# Altium PCB BLDC_Driver_1_1.PcbDoc
Units mil, origin at the board's own origin, x right, y up, seen from the top; angles counter-clockwise.
Board outline 3369 x 3691 mil, 2 copper layers (Top Layer, Bottom Layer); 63 components, 51 nets, 175 pads, 0 vias.
Unrouted connection lines stored in the file: 124.
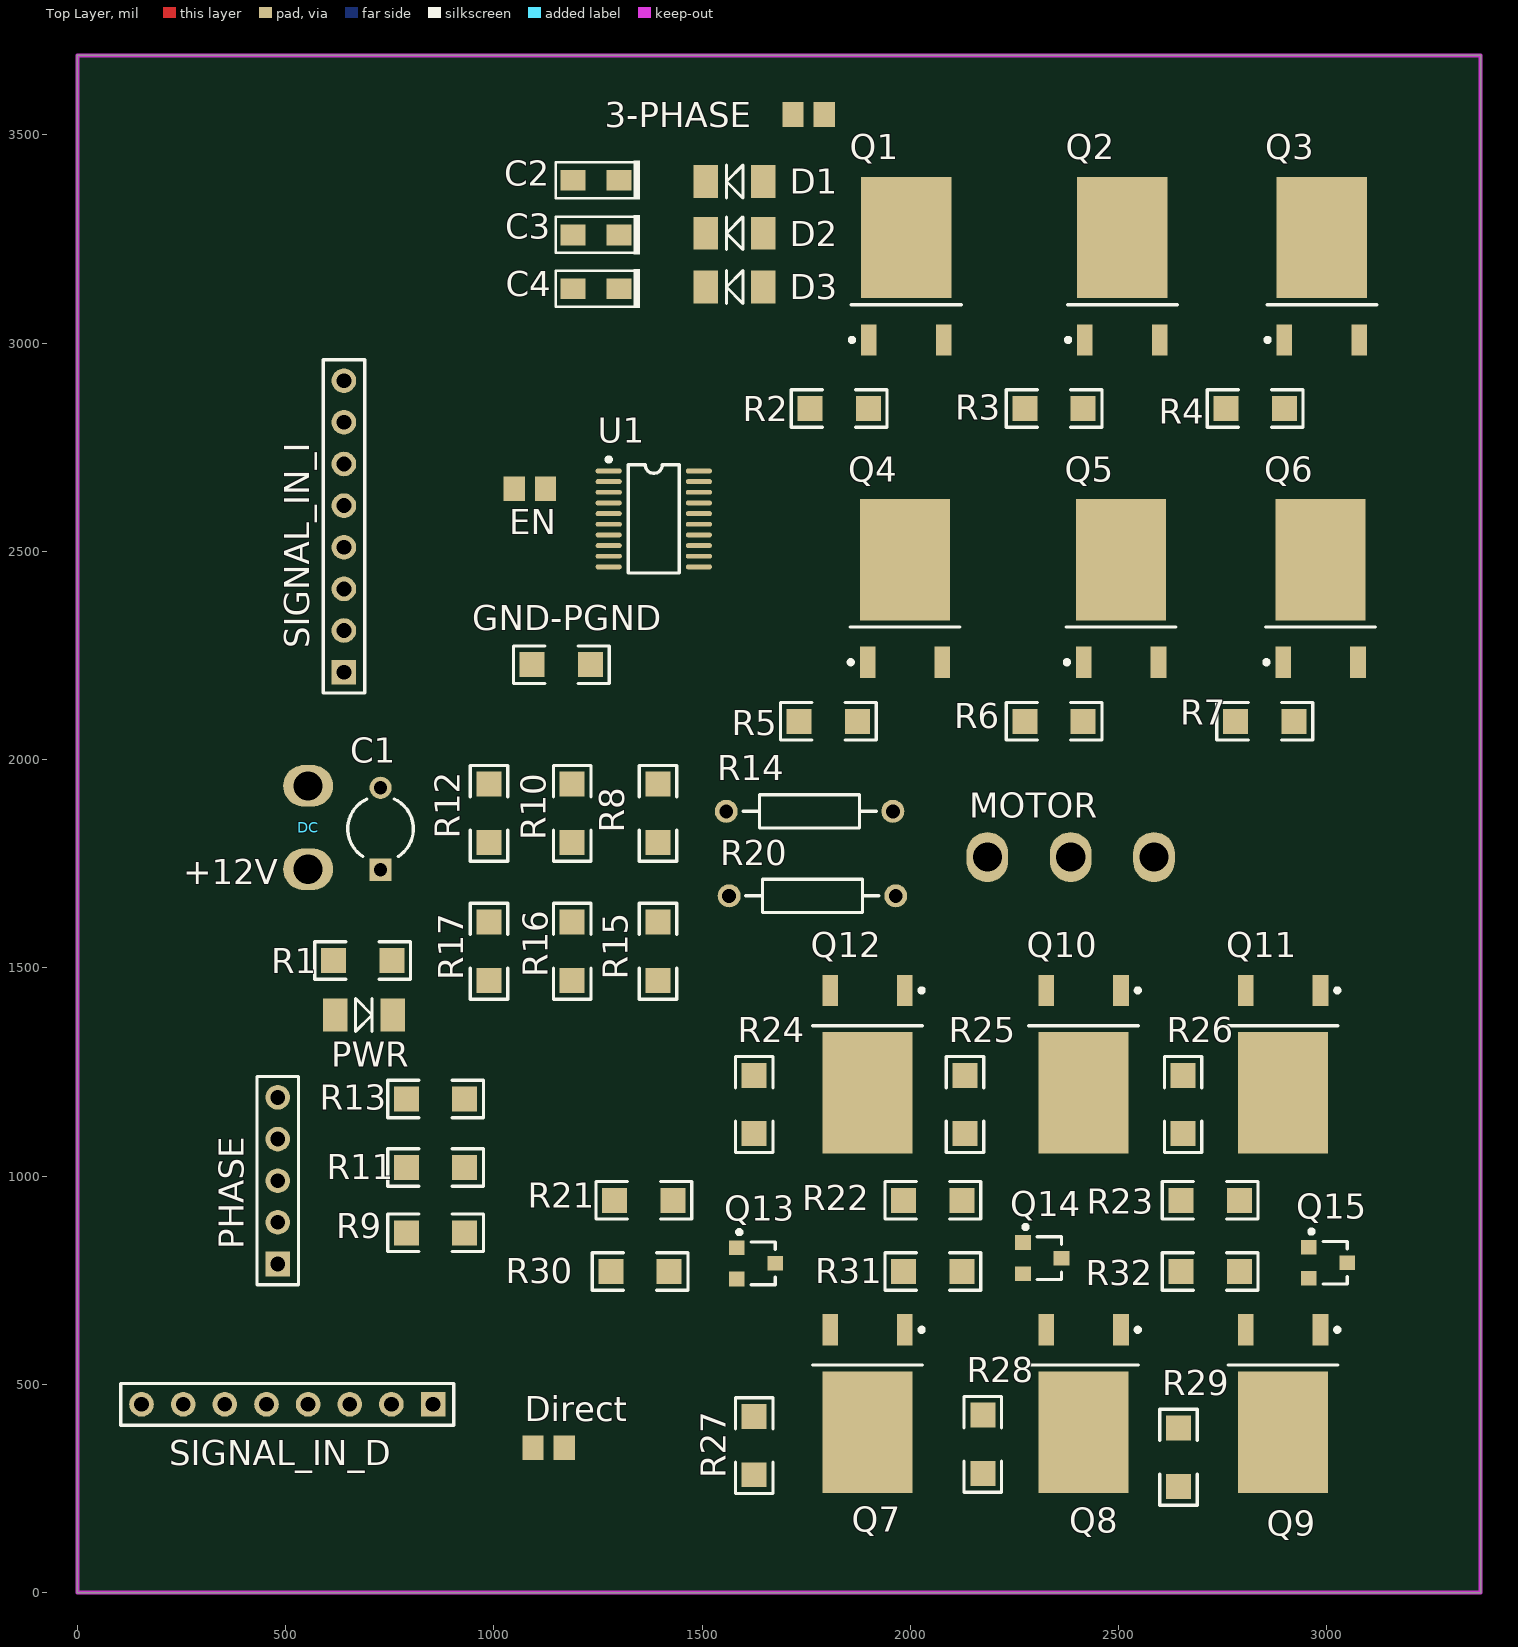
[diagram p0: Top Layer view]
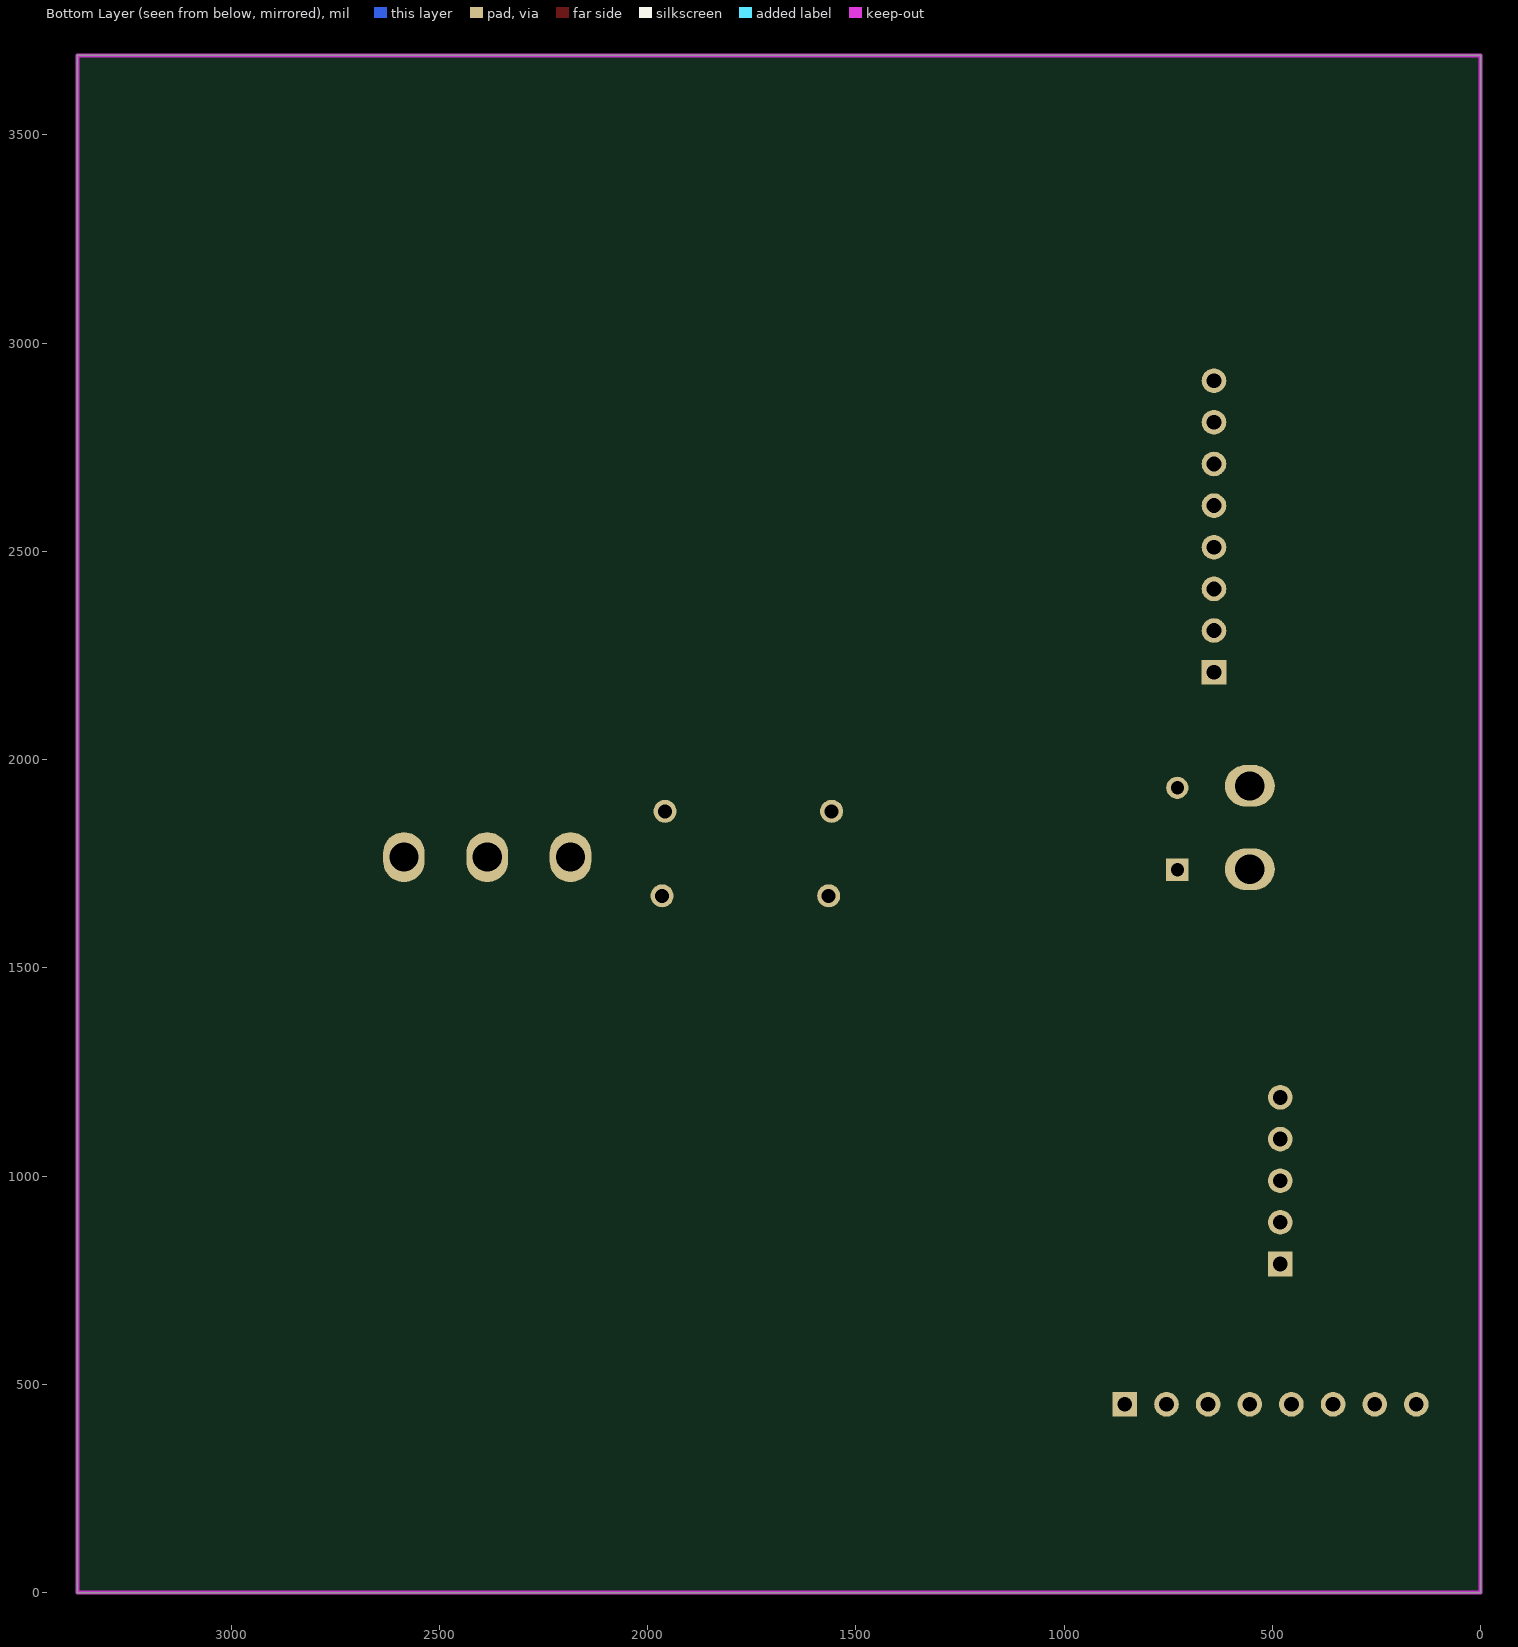
[diagram p1: Bottom Layer view, seen from below]

## Layer stack, top to bottom
Top Solder: solder mask 0.4, Solder Resist, Dk 3.5
Top Layer: signal copper 1.4
Dielectric 1: dielectric 12.6, FR-4, Dk 4.8
Bottom Layer: signal copper 1.4
Bottom Solder: solder mask 0.4, Solder Resist, Dk 3.5

## Board outline
0,0 0,3691 3369,3691 3369,0

## Design rules (kind name [scope] priority, off if disabled: settings)
Clearance [All] p1: gap=7
PolygonConnect [All] p1: connectstyle=Relief reliefconductorwidth=10 reliefentries=4 polygonreliefangle="90 Angle" airgapwidth=10
RoutingVias [All] p1: holewidth=21 width=40 viastyle="Through Hole" minholewidth=21 minwidth=40 maxholewidth=28 maxwidth=50
SolderMaskExpansion [All] p1: expansion=4
Width [All] p1: maxlimit=100 minlimit=15 preferedwidth=20
30 further rules are at their usual default settings.

## Components (designator, comment, footprint, x,y, rotation, side; value= is the part's Value field where it differs from the comment)
3-PHASE "Res2" 0805-2 1755.6,3549 r180 top
C1 "Cap2" CAPR5-4X5 728,1834 r90 top
C2 "Cap Pol" CAP-3216 1245,3391 r180 top
C3 "Cap Pol" CAP-3216 1245,3259.76 r180 top
C4 "Cap Pol" CAP-3216 1245,3130.52 r180 top
D1 "D-Schottky" DIODE-1206 1647,3387.98 r180 top
D2 "D-Schottky" DIODE-1206 1647,3264 r180 top
D3 "D-Schottky" DIODE-1206 1647,3134.76 r180 top
DC "JXZ2" JXZ2 554,1837 r270 top
Direct "Res2" 0805-2 1131.4,348 r180 top
EN "Res2" 0805-2 1086.6,2650 r180 top
GND-PGND "Res2" 1206 1162,2228 r0 top
MOTOR "JXZ3" JXZ_3 2385,1766 r0 top
PHASE "Header 5" HDR1X5 481,789 r90 top
PWR "LED2" DIODE-1206 619,1387 r0 top
Q1 "IRFR1205" TO-252AA_N 1990,3185 r90 top
Q2 "IRFR1205" TO-252AA_N 2509,3185 r90 top
Q3 "IRFR1205" TO-252AA_N 2988,3185 r90 top
Q4 "IRFR1205" TO-252AA_N 1987,2411.1 r90 top
Q5 "IRFR1205" TO-252AA_N 2506,2411.1 r90 top
Q6 "IRFR1205" TO-252AA_N 2985,2411.1 r90 top
Q7 "IRFR5305" TO-252AA_N 1897,453.9 r270 top
Q8 "IRFR5305" TO-252AA_N 2416,453.9 r270 top
Q9 "IRFR5305" TO-252AA_N 2895,453.9 r270 top
Q10 "IRFR1205" TO-252AA_N 2416,1268.83 r270 top
Q11 "IRFR1205" TO-252AA_N 2895,1268.83 r270 top
Q12 "IRFR1205" TO-252AA_N 1897,1268.83 r270 top
Q13 "PDTC143ET" SOT-23 1629.26,790.6 r270 top
Q14 "PDTC143ET" SOT-23 2316.74,803 r270 top
Q15 "PDTC143ET" SOT-23 3003,792 r270 top
R1 "Res2" 1206 685,1518 r0 top
R2 "Res2" 1206 1829,2843 r0 top
R3 "Res2" 1206 2345,2843 r0 top
R4 "Res2" 1206 2828,2843 r0 top
R5 "Res2" 1206 1803,2092 r0 top
R6 "Res2" 1206 2345,2092 r0 top
R7 "Res2" 1206 2851,2092 r0 top
R8 "Res2" 1206 1394,1871 r270 top
R9 "Res2" 1206 860,864 r0 top
R10 "Res2" 1206 1188,1871 r270 top
R11 "Res2" 1206 860,1021 r0 top
R12 "Res2" 1206 988,1871 r270 top
R13 "Res2" 1206 860,1185 r0 top
R14 "Res2" AXIAL-0.4 1758,1876 r0 top
R15 "Res2" 1206 1394,1540 r90 top
R16 "Res2" 1206 1188,1540 r90 top
R17 "Res2" 1206 988,1540 r90 top
R20 "Res2" AXIAL-0.4 1765,1673 r0 top
R21 "Res2" 1206 1360,942 r0 top
R22 "Res2" 1206 2054,942 r0 top
R23 "Res2" 1206 2720,942 r0 top
R24 "Res2" 1206 1625,1172 r270 top
R25 "Res2" 1206 2131,1172 r270 top
R26 "Res2" 1206 2655,1172 r270 top
R27 "Res2" 1206 1625,353 r90 top
R28 "Res2" 1206 2174,356 r90 top
R29 "Res2" 1206 2644,325 r90 top
R30 "Res2" 1206 1351,771 r0 top
R31 "Res2" 1206 2054,771 r0 top
R32 "Res2" 1206 2720,771 r0 top
SIGNAL_IN_D "Header 8" HDR1X8 854,452 r180 top
SIGNAL_IN_I "Header 8" HDR1X8 640,2210 r90 top
U1 "FD6288T" TSSOP20 1384,2578 r270 top

## Footprints (in the part's own frame and the unit in brackets; to place one, negate y for a bottom-side part, rotate by r counter-clockwise, add the part's x,y. Pads: shape width x height; smd on the part's side, far side on the other; paste and mask are expansions set on the pad)
0805-2 [mm] "贴片无丝印"
  rect 1.3x1.5 smd: 1(-0.95,0) 2(0.95,0)
1206 [mil] "贴片元件"
  rect 60x60 smd: 1(-70,0) 2(70,0)
  silkscreen extent -115,-45 115,45, body extent -75,-35 75,35, height 39
AXIAL-0.4 [mm] "Axial Device, Thru-Hole; 2 Leads; 0.4 in Pin Spacing"
  round 1.4 hole 0.85: 1(-5.08,0) 2(5.08,0)
  silkscreen extent -4.06,-1.02 4.06,1.02
CAP-3216 [mil] "钽电容"
  rect 60x50 smd: 1(-55,0) 2(55,0)
  silkscreen extent -106,-48 96,46
CAPR5-4X5 [mm] "Capacitor; 2 Leads"
  rect 1.35x1.35 hole 0.8: 1(-2.5,0)
  round 1.35 hole 0.8: 2(2.5,0)
  silkscreen extent -1.69,-2 1.82,2
DIODE-1206 [mm] "玻璃封装二极管"
  rect 1.5x2 smd: 1(0,0) 2(3.5,0)
  silkscreen extent 1.25,-1 2.25,1
HDR1X5 [mm] "Connector; Header; 5 Position"
  rect 1.5x1.5 hole 0.9: 1(0,0)
  round 1.5 hole 0.9: 2(2.54,0) 3(5.08,0) 4(7.62,0) 5(10.16,0)
  silkscreen extent -1.27,-1.27 11.43,1.27
HDR1X8 [mm] "Connector; Header; 8 Position"
  rect 1.5x1.5 hole 0.9: 1(0,0)
  round 1.5 hole 0.9: 2(2.54,0) 3(5.08,0) 4(7.62,0) 5(10.16,0) 6(12.7,0) 7(15.24,0) 8(17.78,0)
  silkscreen extent -1.27,-1.27 19.05,1.27
JXZ2 [mil]
  oval 100x120 hole 70: 1(100,0) 2(-100,0)
JXZ_3 [mil]
  oval 100x120 hole 70: 1(-200,0) 2(0,0) 3(200,0)
SOT-23 [mm]
  rect 0.9x0.95 smd: 1(-0.95,-1.175) 2(0.95,-1.175) 3(0,1.175)
  silkscreen extent -2.03,-1.14 1.3,1.18
TO-252AA_N [mm] "D-PAK, 4-Leads, Body 6.1x6.5mm, Pitch 2.28mm, Lead Span 9.9mm, IPC Medium Density"
  rect 1.9x0.95 smd: 1(-4.5,2.28) 3(-4.5,-2.28)
  rect 7.4x5.5 smd: 4(1.75,0)
  silkscreen extent -4.62,-3.35 -2.35,3.43, body extent -2.25,-3.37 4.1,3.37, height 2.38
TSSOP20 [mm] "Shrink Small Outline; 20 Leads; Body Width 4.4 mm; Pitch 0.65 mm"
  oval 0.3x1.6 smd: 1(-2.925,-2.75) 2(-2.275,-2.75) 3(-1.625,-2.75) 4(-0.975,-2.75) 5(-0.325,-2.75) 6(0.325,-2.75) 7(0.975,-2.75) 8(1.625,-2.75) 9(2.275,-2.75) 10(2.925,-2.75) 11(2.925,2.75) 12(2.275,2.75) 13(1.625,2.75) 14(0.975,2.75) 15(0.325,2.75) 16(-0.325,2.75) 17(-0.975,2.75) 18(-1.625,2.75) 19(-2.275,2.75) 20(-2.925,2.75)
  silkscreen extent -3.75,-2.87 3.3,1.55, body extent -3.3,-1.91 3.3,1.91, height 1.1

## Part data
3-PHASE Direct EN GND-PGND R1 R2 R3 R4 R5 R6 R7 R8 R9 R10 R11 R12 R13 R14 R15 R16 R17 R20 R21 R22 R23 R24 R25 R26 R27 R28 R29 R30 R31 R32: "Resistor"
C1: "Capacitor"
C2 C3 C4: "极性电解电容"
D1 D2 D3: "肖特基二极管"
PHASE: "Header, 5-Pin"
PWR: "Typical RED, GREEN, YELLOW, AMBER GaAs LED"
Q1 Q2 Q3 Q4 Q5 Q6 Q7 Q8 Q9 Q10 Q11 Q12: "HEXFET Power MOSFET"
Q13 Q14 Q15: library part SS8050, "NPN贴片三极管"
SIGNAL_IN_D SIGNAL_IN_I: "Header, 8-Pin"

## Nets (pads, with @x,y where several pads share a name; then routed paths per layer and width w, separated by ;. In a path a pad name is that pad's centre, name@x,y a point inside that pad or via, vN(x,y) a via of type N, cw(c..) or ccw(c..) an arc to the next point about the centre after c; other vN are vias at no path point)
A+: R30.1 SIGNAL_IN_D.7
A-: R21.1 SIGNAL_IN_D.8
B+: R31.1 SIGNAL_IN_D.5
B-: R22.1 SIGNAL_IN_D.6
C+: R32.1 SIGNAL_IN_D.3
C-: R23.1 SIGNAL_IN_D.4
DC_IN: 3-PHASE.2 C1.1 D1.1 D2.1 D3.1 DC.1 Direct.2 EN.2 R1.2
GND: GND-PGND.2 PHASE.1 Q13.2 Q14.2 Q15.2 R15.1 R16.1 R17.1 SIGNAL_IN_D.1 SIGNAL_IN_D.2 SIGNAL_IN_I.1 SIGNAL_IN_I.2
HIN1: SIGNAL_IN_I.8 U1.1
HIN2: SIGNAL_IN_I.7 U1.2
HIN3: SIGNAL_IN_I.6 U1.3
HO1: R2.1 U1.19
HO2: R3.1 U1.16
HO3: R4.1 U1.13
LIN1: SIGNAL_IN_I.5 U1.4
LIN2: SIGNAL_IN_I.4 U1.5
LIN3: SIGNAL_IN_I.3 U1.6
LO1: R5.1 U1.11
LO2: R6.1 U1.10
LO3: R7.1 U1.9
MOTOR_A: C4.2 MOTOR.1 Q1.3 Q4.4 Q7.4 Q12.4 R8.1 U1.18
MOTOR_B: C3.2 MOTOR.2 Q2.3 Q5.4 Q8.4 Q10.4 R10.1 U1.15
MOTOR_C: C2.2 MOTOR.3 Q3.3 Q6.4 Q9.4 Q11.4 R12.1 U1.12
NEG: PHASE.2 R9.2 R11.2 R13.2
Net3-PHASE_1: 3-PHASE.1 Q1.4 Q2.4 Q3.4
NetC2_1: C2.1 D1.2 U1.14
NetC3_1: C3.1 D2.2 U1.17
NetC4_1: C4.1 D3.2 U1.20
NetDirect_1: Direct.1 Q7.3 Q8.3 Q9.3 R27.2 R28.2 R29.2
NetEN_1: EN.1 U1.7
NetPWR_1: PWR.1 R1.1
NetQ1_1: Q1.1 R2.2
NetQ2_1: Q2.1 R3.2
NetQ3_1: Q3.1 R4.2
NetQ4_1: Q4.1 R5.2
NetQ5_1: Q5.1 R6.2
NetQ6_1: Q6.1 R7.2
NetQ7_1: Q7.1 Q13.3 R27.1
NetQ8_1: Q8.1 Q14.3 R28.1
NetQ9_1: Q9.1 Q15.3 R29.1
NetQ10_1: Q10.1 R22.2 R25.2
NetQ11_1: Q11.1 R23.2 R26.2
NetQ12_1: Q12.1 R21.2 R24.2
NetQ13_1: Q13.1 R30.2
NetQ14_1: Q14.1 R31.2
NetQ15_1: Q15.1 R32.2
PGND: C1.2 DC.2 GND-PGND.1 PWR.2 R14.1 R20.1 U1.8
SENSE_A: PHASE.3 R8.2 R9.1 R15.2
SENSE_B: PHASE.4 R10.2 R11.1 R16.2
SENSE_C: PHASE.5 R12.2 R13.1 R17.2
SENSE_I: Q4.3 Q5.3 Q6.3 Q10.3 Q11.3 Q12.3 R14.2 R20.2 R24.1 R25.1 R26.1

## Keep-outs
Keep-Out Layer:
  the board outline again, w10

## Silkscreen, mask and mechanical layers (free items; w line width, h text height)
Top Overlay:
  text "+12V" at 254,1701 h60